# EAGLE board LR21_Dash (EAGLE 9.2.2)
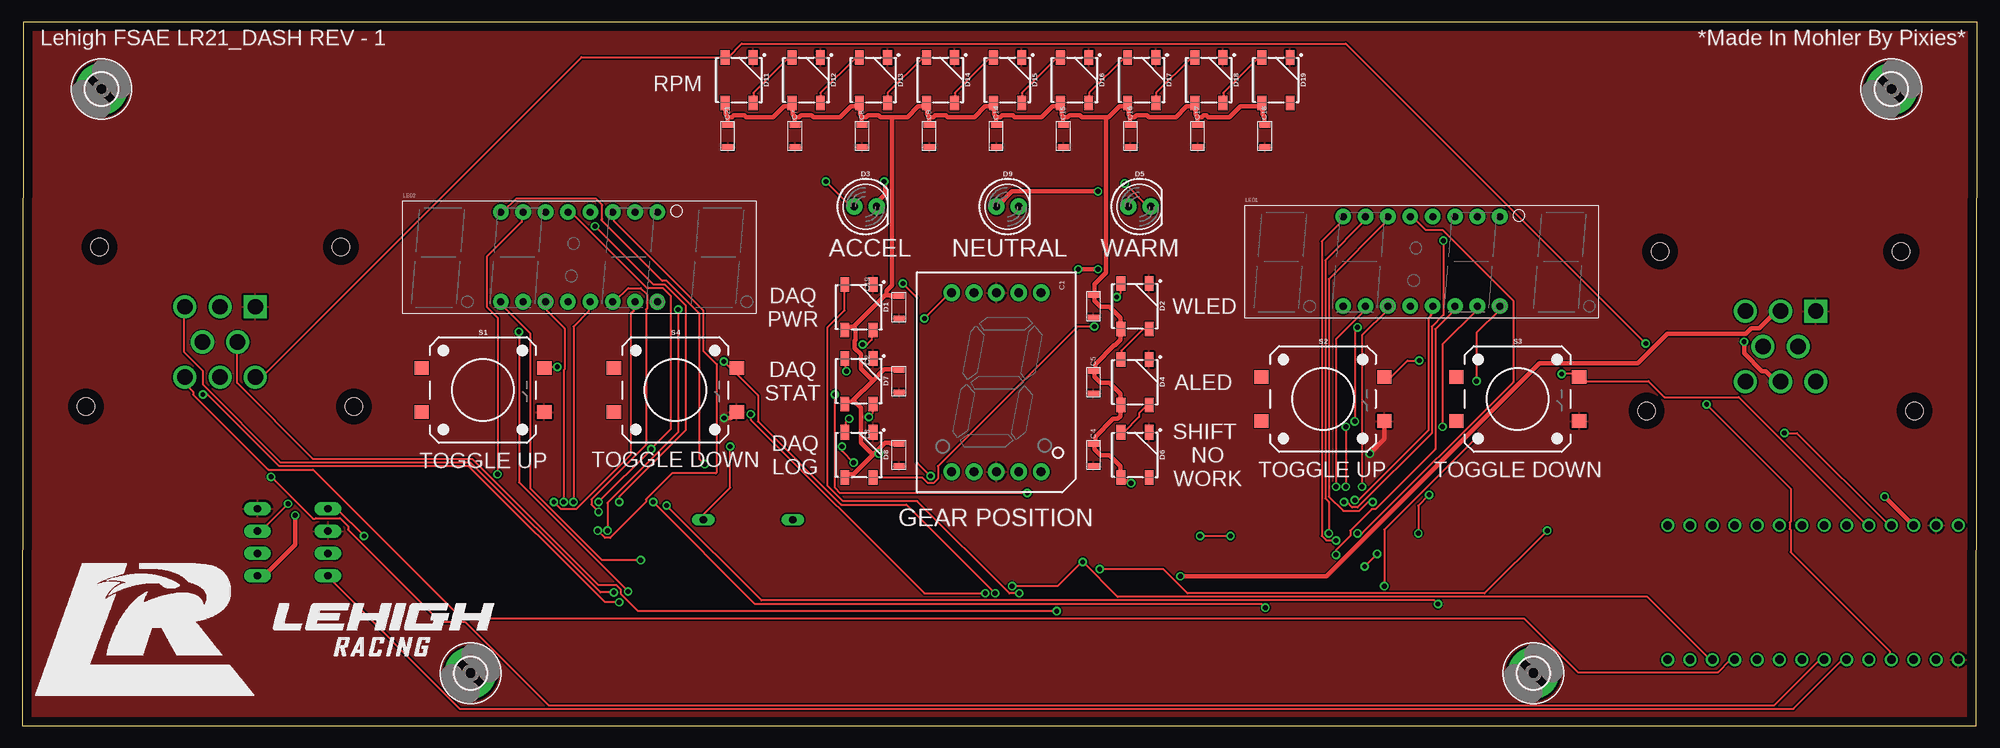
[diagram p0: board, top side]
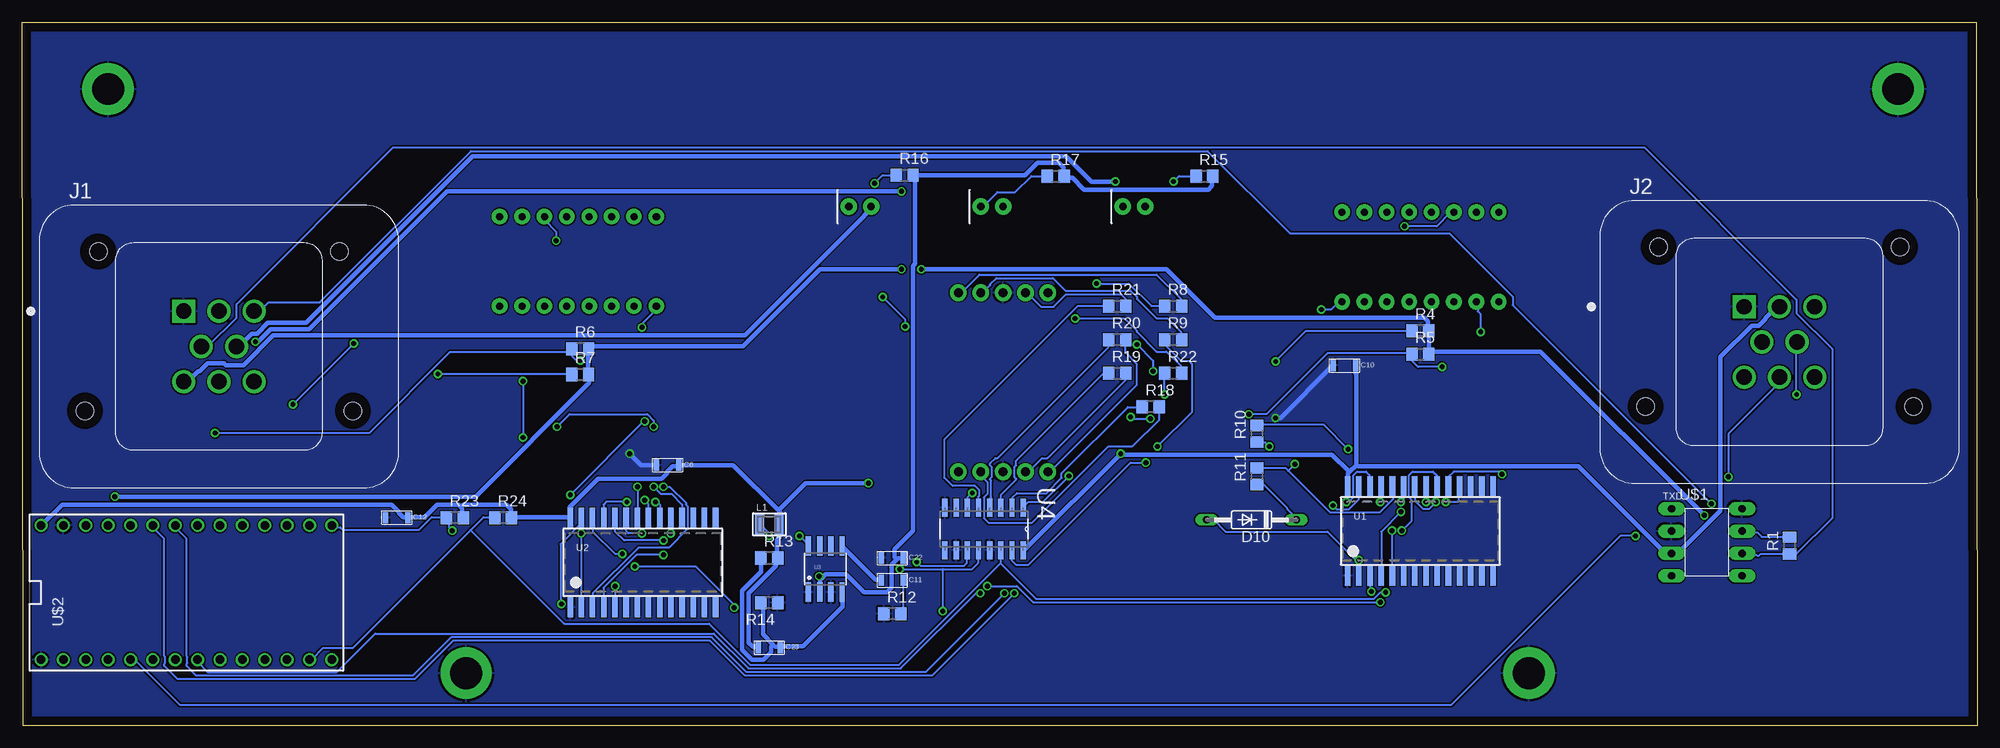
[diagram p1: board, bottom side, seen from below]

Size 222 x 79.87 mm. Coordinates in mm from the lower left corner, seen from the top.
Outline: 0,0 221.87,0 222,79.87 0.13,79.87 0,0
Copper layers (1*16): Top 0.035mm / dielectric 1.5mm / Bottom 0.035mm
Design rules "default": minimum track width 6mil, minimum drill 0.35mm, track to track 6mil, track to pad 6mil, pad to pad 6mil, via to via 6mil, smd to smd 6mil, copper to edge 40mil, drill to drill 6mil, minimum pad ring 10mil, minimum via ring 8mil, stop-mask expansion 4mil, vias tented up to drill 0mil, thermal gap 10mil
Net classes: 0 default: width 0.254 mm, drill 0.55 mm; 1 pwr: width 0.508 mm, drill 0.55 mm

## Footprints (pad centres in the part's own frame; a part is rotated, then mirrored left to right if it is on the bottom)
1005 = smd 0.635 x 1.27: P$1 1.27,0; P$2 -1.27,0
WS2812B = smd 1.651 x 1: 1 2.577,-1.6; 2 2.577,1.6; 3 -2.577,1.6; 4 -2.577,-1.6
LED_5MM = drill 0.813 pad 1.88: A -1.27,0; K 1.27,0
DO35-10 = drill 0.813 long: A 5.08,0; C -5.08,0
3,6-PAD = drill 3.6 pad 5.842: B3,6 0,0
TE_1-776276-1 = drill 1.75 square: 1 -4,4 | drill 1.75: 2 0,4; 3 4,4; 4 -2,0; 5 2,0; 6 -4,-4; 7 0,-4; 8 4,-4 | hole 2: -13.7,10.8; 13.7,10.8; -15.2,-7.3; 15.2,-7.3
INDUCTOR_1007 = smd 1.016 x 2.2: P$1 -1.127,0; P$2 1.127,0
7-SEGMENT-4DIGIT-YOUNGSUN = drill 0.8 pad 1.778: 1 -8.89,-5.08; 2 -6.35,-5.08; 3 -3.81,-5.08; 4 -1.27,-5.08; 5 1.27,-5.08; 6 3.81,-5.08; 7 6.35,-5.08; 8 8.89,-5.08; 9 8.89,5.08; 10 6.35,5.08; 11 3.81,5.08; 12 1.27,5.08; 13 -1.27,5.08; 14 -3.81,5.08; 15 -6.35,5.08; 16 -8.89,5.08
R0805 = smd 1.3 x 1.5: 1 -0.95,0; 2 0.95,0
TACTILE_SWITCH_SMD_12MM = smd 1.6 x 1.55: 1 6.975,-2.5; 2 -6.975,-2.5; 3 6.975,2.5; 4 -6.975,2.5
SOP28_300MIL = smd 0.635 x 2.286: P$1 -8.255,-5.08; P$2 -6.985,-5.08; P$3 -5.715,-5.08; P$4 -4.445,-5.08; P$5 -3.175,-5.08; P$6 -1.905,-5.08; P$7 -0.635,-5.08; P$8 0.635,-5.08; P$9 1.905,-5.08; P$10 3.175,-5.08; P$11 4.445,-5.08; P$12 5.715,-5.08; P$13 6.985,-5.08; P$14 8.255,-5.08; P$15 8.255,5.08; P$16 6.985,5.08; P$17 5.715,5.08; P$18 4.445,5.08; P$19 3.175,5.08; P$20 1.905,5.08; P$21 0.635,5.08; P$22 -0.635,5.08; P$23 -1.905,5.08; P$24 -3.175,5.08; P$25 -4.445,5.08; P$26 -5.715,5.08; P$27 -6.985,5.08; P$28 -8.255,5.08
SOIC8 = smd 0.61 x 2.21: 1 -1.905,-2.616; 2 -0.635,-2.616; 3 0.635,-2.616; 4 1.905,-2.616; 5 1.905,2.616; 6 0.635,2.616; 7 -0.635,2.616; 8 -1.905,2.616
SOIC127P600X175-16N = smd 2.057 x 0.61: 1 -4.801,8.89; 2 -4.801,7.62; 3 -4.801,6.35; 4 -4.801,5.08; 5 -4.801,3.81; 6 -4.801,2.54; 7 -4.801,1.27; 8 -4.801,0; 9 0,0; 10 0,1.27; 11 0,2.54; 12 0,3.81; 13 0,5.08; 14 0,6.35; 15 0,7.62; 16 0,8.89
MCP2561_PDIP = drill 0.813 pad 1.524 long: CANH 4,1.27; CANL 4,-1.27; RXD -4,-3.81; SPLIT 4,-3.81; STBY 4,3.81; TXD -4,3.81; VDD -4,-1.27; VSS -4,1.27
TEENSY_3.0-3.2&LC_DIL = drill 0.965: 0 -7.62,13.97; 1 -7.62,11.43; 2 -7.62,8.89; 3 -7.62,6.35; 3.3V 7.62,11.43; 4 -7.62,3.81; 5 -7.62,1.27; 6 -7.62,-1.27; 7 -7.62,-3.81; 8 -7.62,-6.35; 9 -7.62,-8.89; 10 -7.62,-11.43; 11 -7.62,-13.97; 12 -7.62,-16.51; 13 7.62,-16.51; 14/A0 7.62,-13.97; 15/A1 7.62,-11.43; 16/A2 7.62,-8.89; 17/A3 7.62,-6.35; 18/A4 7.62,-3.81; 19/A5 7.62,-1.27; 20/A6 7.62,1.27; 21/A7 7.62,3.81; 22/A8 7.62,6.35; 23/A9 7.62,8.89; AGND 7.62,13.97; GND -7.62,16.51; VIN 7.62,16.51
7-SEGMENT-1"PTH = drill 1 pad 1.88: 1 -5.08,-10.16; 2 -2.54,-10.16; 3 0,-10.16; 4 2.54,-10.16; 5 5.08,-10.16; 6 5.08,10.16; 7 2.54,10.16; 8 0,10.16; 9 -2.54,10.16; 10 -5.08,10.16

## Placement (x,y rotation side)
C1  0.1uF  [1005]  121.67,47.62 90 top
C2  0.1uF  [1005]  99.57,39.12 90 top
C3  0.1uF  [1005]  99.57,30.73 90 top
C4  0.1uF  [1005]  121.67,30.73 90 top
C5  0.1uF  [1005]  121.67,38.99 90 top
C6  100uF  [1005]  148.72,29.59 0 bottom
C7  0.1uF  [1005]  87.76,66.93 90 top
C8  0.1uF  [1005]  95.38,66.93 90 top
C9  0.1uF  [1005]  103,66.93 90 top
C10  100uF  [1005]  71.88,40.89 0 bottom
C11  3.9u  [1005]  123.19,16.51 0 bottom
C12  100uF  [1005]  179.45,23.62 0 bottom
C14  0.1uF  [1005]  110.62,66.93 90 top
C15  0.1uF  [1005]  118.24,66.93 90 top
C16  0.1uF  [1005]  125.86,66.93 90 top
C17  0.1uF  [1005]  133.48,66.93 90 top
C18  0.1uF  [1005]  141.1,66.93 90 top
C19  0.1uF  [1005]  99.57,47.5 90 top
C21  0.1uF  [1005]  80.14,66.93 90 top
C22  22u  [1005]  123.19,19.05 0 bottom
C23  22u  [1005]  137.16,8.89 0 bottom
D1  WS2812B  [WS2812B]  95,47.5 270 top
D2  WS2812B  [WS2812B]  126.36,47.62 270 top
D3  [LED_5MM]  95.76,58.93 0 top
D4  WS2812B  [WS2812B]  126.36,38.99 270 top
D5  [LED_5MM]  126.87,58.93 0 top
D6  WS2812B  [WS2812B]  126.36,30.73 270 top
D7  WS2812B  [WS2812B]  95,39.12 270 top
D8  WS2812B  [WS2812B]  95,30.73 270 top
D9  [LED_5MM]  111.89,58.93 0 top
D10  1N4148  [DO35-10]  82.42,23.37 180 bottom
D11  WS2812B  [WS2812B]  81.41,73.28 270 top
D12  WS2812B  [WS2812B]  89.03,73.28 270 top
D13  WS2812B  [WS2812B]  96.65,73.28 270 top
D14  WS2812B  [WS2812B]  104.27,73.28 270 top
D15  WS2812B  [WS2812B]  111.89,73.28 270 top
D16  WS2812B  [WS2812B]  119.51,73.28 270 top
D17  WS2812B  [WS2812B]  127.13,73.28 270 top
D18  WS2812B  [WS2812B]  134.75,73.28 270 top
D19  WS2812B  [WS2812B]  142.37,73.28 270 top
H5  MOUNT-PAD-ROUND3.6  [3,6-PAD]  171.58,5.97 0 top
H6  MOUNT-PAD-ROUND3.6  [3,6-PAD]  50.93,5.97 0 top
H7  MOUNT-PAD-ROUND3.6  [3,6-PAD]  212.22,72.26 0 top
H8  MOUNT-PAD-ROUND3.6  [3,6-PAD]  9.02,72.26 0 top
J1  1-776276-1  [TE_1-776276-1]  199.64,43.05 0 bottom
J2  1-776276-1  [TE_1-776276-1]  22.48,43.56 0 bottom
L1  4.7u  [INDUCTOR_1007]  137.16,22.86 0 bottom
LED1  YSD-439AB4B-35  [7-SEGMENT-4DIGIT-YOUNGSUN]  158.88,52.7 0 top
LED2  YSD-439AB4B-35  [7-SEGMENT-4DIGIT-YOUNGSUN]  63.25,53.21 0 top
R1  120  [R0805]  21.34,20.45 90 bottom
R4  10k  [R0805]  63.25,44.83 0 bottom
R5  10k  [R0805]  63.25,42.16 0 bottom
R6  10k  [R0805]  158.62,42.8 0 bottom
R7  10k  [R0805]  158.62,39.88 0 bottom
R8  220  [R0805]  91.31,47.62 0 bottom
R9  220  [R0805]  91.31,43.81 0 bottom
R10  47K  [R0805]  81.79,33.15 90 bottom
R11  47K  [R0805]  81.79,28.32 90 bottom
R12  10k  [R0805]  123.19,12.7 0 bottom
R13  24.9k  [R0805]  137.16,19.05 0 bottom
R14  4.75k  [R0805]  137.16,13.97 180 bottom
R15  560  [R0805]  87.76,62.36 0 bottom
R16  560  [R0805]  121.79,62.48 0 bottom
R17  560  [R0805]  104.65,62.36 0 bottom
R18  220  [R0805]  93.85,36.2 0 bottom
R19  220  [R0805]  97.66,40.01 0 bottom
R20  220  [R0805]  97.66,43.81 0 bottom
R21  220  [R0805]  97.66,47.62 0 bottom
R22  220  [R0805]  91.31,40.01 0 bottom
R23  10k  [R0805]  172.85,23.62 0 bottom
R24  10k  [R0805]  167.39,23.62 0 bottom
S1  MOMENTARY-SWITCH-SPST-SMD-12MM  [TACTILE_SWITCH_SMD_12MM]  52.32,38.1 0 top
S2  MOMENTARY-SWITCH-SPST-SMD-12MM  [TACTILE_SWITCH_SMD_12MM]  147.7,37.08 0 top
S3  MOMENTARY-SWITCH-SPST-SMD-12MM  [TACTILE_SWITCH_SMD_12MM]  169.8,37.08 0 top
S4  MOMENTARY-SWITCH-SPST-SMD-12MM  [TACTILE_SWITCH_SMD_12MM]  74.17,38.1 0 top
U1  [SOP28_300MIL]  63.25,22.1 0 bottom
U2  [SOP28_300MIL]  151.51,18.54 0 bottom
U3  NCP3170  [SOIC8]  130.81,17.78 0 bottom
U4  SN74HC595D  [SOIC127P600X175-16N]  117.22,19.94 270 bottom
U$1  MCP2561MCP  [MCP2561_PDIP]  30.73,20.83 0 bottom
U$2  TEENSY_3.1-3.2_DIL  [TEENSY_3.0-3.2&LC_DIL]  203.33,15.11 90 bottom
U$3  YSD-160AB3C-8  [7-SEGMENT-1"PTH]  110.62,38.99 0 top

## Library data of the parts
C1-C12 C14-C19 C21-C23 = scenix4
D1 D2 D4 D6-D8 D11-D19 = SparkFun-LED@1; PROD_ID: DIO-12503
D3 D5 D9 = SparkFun-LED
D10 = diode
H5-H8 = holes
J1 J2 = 1-776276-1; MANUFACTURER: TE Connectivity; METADATA: Manufacturer recommendations; PARTREV: B9
L1 U1 U2 = microbuilder
LED1 LED2 = SparkFun-LED@1; PROD_ID: COMP-09664
R1 R4-R24 = eagle-ltspice; SPICEMODEL: NONE; SPICEPREFIX: R
S1-S4 = SparkFun-Switches; PROD_ID: SWCH-11967; SF_SKU: COM-12993
U3 = NCP3170; AVAILABILITY: Unavailable; DESCRIPTION: ON Semiconductor 3A SWITCHING REGULATOR; MF: ON Semiconductor; MP: NCP3170; PACKAGE: SOIC-8 ON Semiconductor; PRICE: None
U4 = SN74HC595D; DESCRIPTION: Shift Register Single 8-Bit Serial to Serial/Parallel 16-Pin SOIC Tube; DIGI-KEY_PART_NUMBER: 296-8344-5-ND; DIGI-KEY_PURCHASE_URL: https://www.digikey.com/product-detail/en/texas-instruments/SN74HC595D/296-8344-5-ND/376752?utm_source=snapeda&utm_medium=aggregator&utm_campaign=symbol; MF: Texas Instruments; MP: SN74HC595D; PACKAGE: SOIC-16 Texas Instruments
U$1 = PoJD
U$2 = Teensy_3_and_LC_Series_Boards_v1.4
U$3 = SparkFun-LED; PROD_ID: COMP-09495

## Nets
A-1: LED2.14 U1.P$25
A-2: LED1.14 U2.P$25
ACCEL_LED [pwr]: D3.K J1.5
B-1: LED2.16 R11.2 U1.P$24
B-2: LED1.16 U2.P$24
BUTTON1_WHEEL: J2.7 U$2.5
BUTTON2_WHEEL: J2.8 U$2.9
BUTTON-1: R4.1 S4.3 U$2.20/A6
BUTTON-2: R5.1 S1.3 U$2.21/A7
BUTTON-3: R7.1 S3.3 U$2.22/A8
BUTTON-4: R6.1 S2.3 U$2.23/A9
C-1: LED2.13 R10.2 U1.P$23
C-2: LED1.13 U2.P$23
CAN-RX: U$1.RXD U$2.4
CAN-TX: U$1.TXD U$2.3
CAN_H: J1.3 R1.2 U$1.CANH
CAN_L: J1.4 R1.1 U$1.CANL
CLOCK: J2.4 R23.1 U4.12 U$2.13
D-1: LED2.3 U1.P$22
D-2: LED1.3 U2.P$22
DATA: J2.3 R24.1 U4.14 U$2.11
DIG1-1: D10.A LED2.1 U1.P$2
DIG1-2: LED2.2 U1.P$3
DIG1-3: LED2.6 U1.P$4
DIG1-4: LED2.8 U1.P$5
DIG2-1: LED1.1 U2.P$2
DIG2-2: LED1.2 U2.P$3
DIG2-3: LED1.6 U2.P$4
DIG2-4: LED1.8 U2.P$5
DP-1: LED2.7 U1.P$18
DP-2: LED1.7 U2.P$18
E-1: LED2.5 U1.P$21
E-2: LED1.5 U2.P$21
F-1: LED2.11 U1.P$20
F-2: LED1.11 U2.P$20
FLEX: J1.8
G-1: LED2.15 U1.P$19
G-2: LED1.15 U2.P$19
GND [pwr]: C1.P$2 C2.P$2 C3.P$2 C4.P$2 C5.P$2 C6.P$2 C7.P$2 C8.P$2 C9.P$2 C10.P$2 C12.P$2 C14.P$2 C15.P$2 C16.P$2 C17.P$2 C18.P$2 C19.P$2 C21.P$2 C22.P$2 D1.3 D2.3 D4.3 D6.3 D7.3 D8.3 D11.3 D12.3 D13.3 D14.3 D15.3 D16.3 D17.3 D18.3 D19.3 H5.B3,6 H6.B3,6 H7.B3,6 H8.B3,6 J1.1 J2.1 R12.1 R14.1 S1.1 S2.1 S3.1 S4.1 U1.P$1 U2.P$1 U3.1 U3.3 U4.8 U4.10 U4.13 U$1.STBY U$1.VSS U$2.AGND U$2.GND U$3.3 U$3.8
LATCH: J2.5 U4.11 U$2.10
LED_TACH_3V3: D11.4 J2.6 U$2.2
LED_WARN_3V1: D13.2 D14.4
LED_WARN_3V3: D1.4 U$2.6
N$2: D10.C R10.1 R11.1
N$4: D2.2 D4.4
N$6: D4.2 D6.4
N$8: D3.A R15.1
N$9: D5.K R16.1
N$10 [pwr]: C11.P$2 U3.5
N$11: D9.K R17.1
N$12: C11.P$1 R12.2
N$14: D2.4 D8.2
N$15: L1.P$1 U3.8
N$16: R8.1 U4.1
N$17: R9.1 U4.15
N$18: R18.1 U4.2
N$19: R19.1 U4.3
N$20: R20.1 U4.4
N$21: D11.2 D12.4
N$22 [pwr]: C23.P$1 R13.1 R14.2 U3.4
N$23: D1.2 D7.4
N$24: D7.2 D8.4
N$25: R21.1 U4.5
N$26: R22.1 U4.6
N$28: D12.2 D13.4
N$29: D14.2 D15.4
N$30: D15.2 D16.4
N$31: D17.2 D18.4
N$32: D18.2 D19.4
N$33: D16.2 D17.4
NEUTRAL_LED [pwr]: D9.A J1.7
PIN_A: R9.2 U$3.7
PIN_B: R8.2 U$3.6
PIN_C: R18.2 U$3.4
PIN_D: R19.2 U$3.2
PIN_E: R20.2 U$3.1
PIN_F: R21.2 U$3.9
PIN_G: R22.2 U$3.10
SCL: U1.P$26 U2.P$26
SDA: U1.P$27 U2.P$27
VDD12V_DASH [pwr]: C22.P$1 J1.2 R15.2 R16.2 R17.2 U3.2
VDD_3V3 [pwr]: R4.2 R5.2 R6.2 R7.2 U$1.SPLIT U$2.3.3V
VIN [pwr]: C1.P$1 C2.P$1 C3.P$1 C4.P$1 C5.P$1 C6.P$1 C7.P$1 C8.P$1 C9.P$1 C10.P$1 C12.P$1 C14.P$1 C15.P$1 C16.P$1 C17.P$1 C18.P$1 C19.P$1 C21.P$1 C23.P$2 D1.1 D2.1 D4.1 D6.1 D7.1 D8.1 D11.1 D12.1 D13.1 D14.1 D15.1 D16.1 D17.1 D18.1 D19.1 J2.2 L1.P$2 R13.2 R23.2 R24.2 U1.P$28 U2.P$28 U4.16 U$1.VDD U$2.VIN
WARM_LED [pwr]: D5.A J1.6

## Tracks (layer width: path | path; a pad name or v marks a point on that pad's centre or on a via)
A-1  (via drill 0.55)
  Top 0.254: v67.79,25.4 67.79,26.01 75.31,33.53 75.31,47.75 72.97,50.09 71.65,50.09 v65.05,56.69
  Bottom 0.254: U1.P$25 67.69,25.5 v67.79,25.4 | v65.05,56.69 61.39,56.69 59.87,58.22 59.46,58.22 LED2.14
A-2  (via drill 0.55)
  Top 0.254: v153.34,25.4 152.83,25.4 151.82,24.38 149.99,24.38 148.36,26.01 148.36,50.7 155.07,57.4 LED1.14
  Bottom 0.254: v153.34,25.4 155.68,25.4 155.98,25.09 155.98,23.67 U2.P$25
ACCEL_LED  (via drill 0.55)
  Top 0.508: v97.87,61.77 97.97,61.67 97.97,60.35 97.05,59.44 97.05,58.93 D3.K
  Bottom 0.508: v97.87,61.77 100.61,61.77 103.45,64.62 170.81,64.62 189.71,45.72 194.08,45.72 195.3,44.5 195.91,44.5 197.33,43.08 197.64,43.08 J1.5
B-1  (via drill 0.55)
  Top 0.254: v77.49,29.69 76.94,30.25 76.94,46.74 73.18,50.49 72.67,50.49 65.76,57.4 65.86,57.51 65.86,59.13 65.15,59.84 56.11,59.84 54.59,58.32 54.38,58.32 LED2.16
  Bottom 0.254: 78.24,28.94 73.48,24.18 67.89,24.18 66.37,25.7 66.37,27.13 U1.P$24 | R11.2 81.71,29.26 78.56,29.26 78.24,28.94 | 78.24,28.94 v77.49,29.69
B-2  (via drill 0.55)
  Top 0.254: v149.17,21.03 148.06,21.03 147.55,21.54 147.55,54.97 149.99,57.4 LED1.16
  Bottom 0.254: v149.17,21.03 153.65,21.03 154.66,22.05 154.66,23.57 U2.P$24
BUTTON1_WHEEL  (via drill 0.55)
  Top 0.254: v28.27,28.25 33.05,23.47 33.25,23.47 33.35,23.57 36.09,23.57 37.01,22.66 37.01,22.25 47.47,11.79 50.32,11.79 59.77,2.34 198.96,2.34 204.04,7.42 204.55,7.42 U$2.5
  Bottom 0.254: v28.27,28.25 28.27,33.12 22.48,38.91 J2.7
BUTTON2_WHEEL
  Top 0.254: U$2.9 194.39,7.42 193.88,7.42 192.56,6.1 176.61,6.1 170.51,12.19 49.91,12.19 33.05,29.06 27.96,29.06 19.43,37.59 19.43,37.9 18.52,38.81 18.52,39.52 J2.8
BUTTON-1  (via drill 0.55)
  Top 0.254: v79.68,41.35 80.39,40.64 81.1,40.64 S4.3 81.1,40.54 81.1,39.93 83.54,37.49 83.54,34.54 92.99,25.09 100.41,25.09 v110.46,15.04
  Bottom 0.254: v79.68,41.35 76.22,44.81 64.24,44.81 R4.1 | v110.46,15.04 119.41,6.1 139.73,6.1 143.69,10.06 173.25,10.06 177.62,5.69 202.21,5.69 203.33,6.81 203.33,7.01 203.23,7.11 203.23,7.82 203.33,7.92 203.33,21.23 204.55,22.45 204.55,22.66 U$2.20/A6
BUTTON-2  (via drill 0.55)
  Top 0.254: v60.78,40.74 59.46,40.74 59.36,40.64 S1.3 | v109.35,15.04 102.44,15.04 82.73,34.75 v82.73,35.36
  Bottom 0.254: v60.78,40.74 63.53,40.74 64.13,41.35 64.13,42.16 R5.1 64.24,42.27 73.79,42.27 80.7,35.36 v82.73,35.36 | v109.35,15.04 118.69,5.69 139.93,5.69 143.89,9.65 173.05,9.65 177.42,5.28 204.34,5.28 205.87,6.81 205.87,7.01 205.77,7.11 205.77,7.82 205.87,7.92 205.87,21.23 207.09,22.45 207.09,22.66 U$2.21/A7
BUTTON-3  (via drill 0.55)
  Top 0.254: v174.78,39.93 176.4,39.93 176.71,39.62 S3.3 176.81,39.52 177.22,39.12 184.63,39.12 186.46,37.29 194.89,37.29 209.42,22.76 209.63,22.76 U$2.22/A8
  Bottom 0.254: v174.78,39.93 159.64,39.93 R7.1
BUTTON-4  (via drill 0.55)
  Top 0.254: v158.62,41.45 157.3,41.45 155.37,39.52 154.76,39.52 S2.3 | v200.08,33.22 201.5,33.22 211.96,22.76 212.17,22.76 U$2.23/A9
  Bottom 0.254: v158.62,41.45 159.03,41.45 159.54,41.96 159.54,42.77 R6.1 159.64,42.37 173.46,42.37 182.6,33.22 v200.08,33.22
C-1  (via drill 0.55)
  Top 0.254: v65.46,25.4 v71.45,31.39 71.45,31.5 73.69,33.73 73.69,48.77 72.77,49.68 70.94,49.68 62.41,58.22 62,58.22 LED2.13
  Bottom 0.254: v71.45,31.39 74.19,34.14 81.71,34.14 R10.2 | v65.46,25.4 65.15,25.7 U1.P$23
C-2  (via drill 0.55)
  Top 0.254: v151.61,21.84 152.12,21.84 169.29,39.01 169.29,48.26 161.27,56.29 159.33,56.29 157.91,57.71 157.61,57.71 LED1.13
  Bottom 0.254: v151.61,21.84 153.14,21.84 153.44,22.15 153.44,23.57 U2.P$23
CAN-RX
  Top 0.254: U$2.4 207.09,7.42 206.58,7.42 201.09,1.93 49.71,1.93 34.67,16.97 U$1.RXD
CAN-TX  (via drill 0.55)
  Top 0.254: v38.84,21.54 35.79,24.59 34.77,24.59 U$1.TXD
  Bottom 0.254: v38.84,21.54 40.56,21.54 59.77,2.34 204.04,2.34 209.12,7.42 209.63,7.42 U$2.3
CAN_H  (via drill 0.55)
  Top 0.254: v30.2,25.2 27.15,22.15 26.75,22.15 U$1.CANH
  Bottom 0.254: R1.2 21.36,21.44 24.51,21.44 25.02,21.95 25.22,21.95 25.32,22.05 26.64,22.05 U$1.CANH | v30.2,25.2 52.76,47.75 52.76,48.67 59.97,55.88 78.05,55.88 87.4,65.23 171.02,65.23 188.19,48.06 193.98,48.06 194.89,47.14 195.61,47.14 J1.3
CAN_L
  Bottom 0.254: U$1.CANL 26.64,19.51 25.32,19.51 25.22,19.41 25.12,19.41 25.02,19.3 24.82,19.3 24.61,19.51 21.36,19.51 R1.1 21.26,19.51 20.55,19.51 16.48,23.57 16.48,42.77 20.55,46.84 20.55,48.36 37.82,65.63 179.86,65.63 197.64,47.85 197.64,46.33 200.89,43.08 201.6,43.08 J1.4
CLOCK  (via drill 0.55)
  Top 0.254: v122.35,17.78 129.56,17.78 132.31,15.04 166.04,15.04 v173.15,22.15 | v117.47,13.01 69.93,13.01 68,14.94 68,15.44 67.49,15.95 65.46,15.95 51.13,30.28 33.05,30.28 24.41,38.91 24.41,43.48 J2.4
  Bottom 0.254: U$2.13 186.77,22.66 186.67,22.55 185.85,22.55 185.55,22.25 176.91,22.25 175.49,23.67 173.86,23.67 R23.1 173.76,23.57 173.56,23.37 173.56,22.55 v173.15,22.15 | U4.12 113.41,18.49 114.12,17.78 117.47,17.78 | v122.35,17.78 117.47,17.78 | 117.47,17.78 v117.47,13.01
D-1  (via drill 0.55)
  Top 0.254: v61.49,25.4 61.49,40.34 61.6,40.44 61.6,45.11 59.56,47.14 59.56,47.24 59.46,47.35 59.46,48.06 LED2.3
  Bottom 0.254: v61.49,25.4 62.31,24.59 62.92,24.59 63.83,25.5 63.83,27.13 U1.P$22
D-2  (via drill 0.55)
  Top 0.254: v152.12,27.13 152.12,44.3 155.07,47.24 LED1.3
  Bottom 0.254: v152.12,27.13 152.12,23.67 U2.P$22
DATA  (via drill 0.55)
  Top 0.254: v67.18,15.14 65.66,15.14 50.93,29.87 29.39,29.87 20.55,38.71 20.55,40.23 18.41,42.37 18.41,47.55 J2.3
  Bottom 0.254: 171.07,22.2 184.43,8.84 187.78,8.84 189.1,7.52 189.31,7.52 U$2.11 | 171.07,22.2 169.6,23.67 168.38,23.67 R24.1 | 110.87,18.49 U4.14 | 110.87,18.49 122.45,6.91 139.32,6.91 143.99,11.58 160.45,11.58 171.07,22.2 | v67.18,15.14 67.79,15.14 68.5,14.43 106.91,14.43 110.87,18.39 110.87,18.49
DIG1-1  (via drill 0.55)
  Top 0.254: v70.23,18.8 65.86,18.8 57.73,26.92 57.73,44.5 54.38,47.85 54.38,48.06 LED2.1
  Bottom 0.254: U1.P$2 70.23,18.49 70.38,18.64 | 70.38,18.64 73.79,22.05 85.37,22.05 86.69,23.37 D10.A | 70.38,18.64 v70.23,18.8
DIG1-2  (via drill 0.55)
  Top 0.254: v68.81,15.24 56.41,27.64 v56.41,44.7
  Bottom 0.254: v68.81,15.24 68.91,15.34 68.91,16.97 U1.P$3 | v56.41,44.7 56.41,46.74 56.72,47.04 56.72,47.24 56.82,47.35 56.82,48.06 LED2.2
DIG1-3  (via drill 0.55)
  Top 0.254: v65.46,24.28 64.64,25.09 64.64,25.7 70.84,31.9 70.84,47.24 70.94,47.35 70.94,48.97 70.23,49.68 68.81,49.68 67.28,48.16 67.08,48.16 LED2.6
  Bottom 0.254: U1.P$4 67.69,22.05 v65.46,24.28
DIG1-4  (via drill 0.55)
  Top 0.254: v66.47,22.15 66.47,25.3 74.5,33.33 v74.5,47.24
  Bottom 0.254: v66.47,22.15 66.47,17.07 U1.P$5 | v74.5,47.24 73.38,47.24 72.57,48.06 72.16,48.06 LED2.8
DIG2-1  (via drill 0.55)
  Top 0.254: v158.52,21.84 158.52,24.99 v159.74,26.21 | v151.31,34.54 151.31,44.91 v151.61,45.21
  Bottom 0.254: v158.52,21.84 158.52,13.51 U2.P$2 | v159.74,26.21 151.41,34.54 v151.31,34.54 | v151.61,45.21 151.61,45.62 149.99,47.24 LED1.1
DIG2-2  (via drill 0.55)
  Top 0.254: v149.17,27.13 149.17,43.89 152.53,47.24 LED1.2
  Bottom 0.254: v149.17,27.13 148.46,27.13 146.63,25.3 146.63,25.09 146.43,24.89 146.43,22.35 148.56,20.22 152.02,20.22 157.2,15.04 157.2,13.51 U2.P$3
DIG2-3  (via drill 0.55)
  Top 0.254: v149.17,19.41 149.17,19.91 150.8,21.54 150.8,22.15 153.24,24.59 153.65,24.59 160.45,31.39 160.45,45.01 162.69,47.24 LED1.6
  Bottom 0.254: v149.17,19.41 152.22,19.41 155.98,15.65 155.98,13.51 U2.P$4
DIG2-4  (via drill 0.55)
  Top 0.254: v154.66,15.85 154.66,22.25 v165.12,32.72 | v165.12,39.12 165.12,44.6 167.77,47.24 LED1.8
  Bottom 0.254: v154.66,15.85 154.66,13.51 U2.P$5 | v165.12,39.12 v165.12,32.72
DP-1  (via drill 0.55)
  Top 0.254: v60.38,25.4 61.19,24.59 62.92,24.59 69.11,30.79 69.11,46.74 69.42,47.04 69.42,47.24 69.52,47.35 69.52,48.06 LED2.7
  Bottom 0.254: v60.38,25.4 59.05,25.4 58.85,25.6 58.85,27.13 U1.P$18
DP-2  (via drill 0.55)
  Top 0.254: v150.29,33.93 v150.29,27.13 | v161.27,33.93 161.27,43.28 165.23,47.24 LED1.7
  Bottom 0.254: v150.29,27.13 149.48,26.31 148.26,26.31 147.04,25.09 147.04,23.67 U2.P$18 | v150.29,33.93 150.29,34.65 151,35.36 159.84,35.36 v161.27,33.93
E-1  (via drill 0.55)
  Top 0.254: v62.61,25.4 62.61,45.31 64.34,47.04 64.34,47.24 64.44,47.35 64.44,48.06 LED2.5
  Bottom 0.254: v62.61,25.4 U1.P$21
E-2  (via drill 0.55)
  Top 0.254: v151.31,25.6 151.71,25.6 159.64,33.53 159.64,46.23 159.94,46.53 159.94,46.63 160.15,46.84 LED1.5
  Bottom 0.254: v151.31,25.6 150.9,25.2 150.9,23.67 U2.P$21
F-1  (via drill 0.55)
  Top 0.254: v65.35,22.15 66.17,21.34 66.78,21.34 70.84,25.4 70.84,25.7 73.79,28.65 78.77,28.65 78.87,28.75 78.87,41.05 77.34,42.57 77.34,47.14 67.18,57.3 67.18,57.4 67.08,57.51 67.08,58.22 LED2.11
  Bottom 0.254: v65.35,22.15 64.24,23.27 64.24,25.6 64.54,25.91 64.54,28.45 64.13,28.85 61.8,28.85 61.39,28.45 61.39,27.23 U1.P$20
F-2  (via drill 0.55)
  Top 0.254: v150.09,25.4 150.39,25.4 151,24.79 151.61,24.79 160.05,33.22 160.05,45.31 161.37,46.63 v161.37,55.07
  Bottom 0.254: v150.09,25.4 149.89,25.4 149.58,25.09 149.58,23.67 U2.P$20 | v161.37,55.07 161.37,56.08 162.69,57.4 LED1.11
G-1  (via drill 0.55)
  Top 0.254: v53.98,28.55 53.98,46.33 52.76,47.55 52.76,53.24 56.72,57.2 56.72,57.4 56.82,57.51 56.82,58.22 LED2.15
  Bottom 0.254: U1.P$19 60.07,28.25 59.46,28.85 54.28,28.85 v53.98,28.55
G-2  (via drill 0.55)
  Top 0.254: v148.36,21.84 148.36,25.4 147.96,25.81 147.96,52.83 152.53,57.4 LED1.15
  Bottom 0.254: v148.36,21.84 148.36,23.57 U2.P$19
GND  (via drill 0.55)
  Top 0.508: v79.7,34.92 80.47,34.92 S4.1 | S2.1 154.68,32.55 v153.01,30.89
  Bottom 0.508: C10.P$2 79.12,34.92 v79.7,34.92 | v153.01,30.89 151.71,29.59 C6.P$2
  pour Top: -1.14,79.88 -1.14,-2.03 1.91,-5.08 221.11,-5.08 224.92,-1.27 224.92,78.61 219.84,83.69 2.67,83.69
  pour Bottom: 2.67,83.69 -1.14,79.88 -1.14,-2.03 1.91,-5.08 221.11,-5.08 224.92,-1.27 224.92,78.61 219.84,83.69
LATCH  (via drill 0.55)
  Top 0.254: U$2.10 191.85,7.52 191.64,7.52 184.53,14.63 124.38,14.63 v120.42,18.59 120.32,18.59 117.58,15.85 v112.39,15.85 | v20.55,37.59 21.06,37.59 29.18,29.46 50.72,29.46 66.17,14.02 v67.79,14.02
  Bottom 0.254: v120.42,18.59 120.02,18.19 115.04,18.19 114.73,18.49 114.73,19.91 U4.11 | v20.55,37.59 20.55,43.48 J2.5 | v67.79,14.02 107.21,14.02 109.04,15.85 v112.39,15.85
LED_TACH_3V3  (via drill 0.55)
  Top 0.254: J2.6 26.54,39.62 27.25,39.62 63.53,75.89 79.78,75.89 D11.4 79.88,75.89 80.19,75.89 81.71,77.42 150.29,77.42 v184.33,43.38 | v191.24,36.47 200.79,26.92 200.79,23.16 200.69,23.06 200.69,22.35 200.79,22.25 200.79,19.71 212.06,8.43 212.06,8.23 212.17,8.13 212.17,7.52 U$2.2
  Bottom 0.254: v184.33,43.38 v191.24,36.47
LED_WARN_3V1
  Top 0.254: D13.2 98.27,70.71 98.27,71.83 102.34,75.89 102.64,75.89 D14.4
LED_WARN_3V3  (via drill 0.55)
  Top 0.254: v113.21,15.04 112.09,15.04 101.62,25.5 93.19,25.5 91.46,27.23 91.46,45.21 93.4,47.14 93.4,49.99 D1.4
  Bottom 0.254: v113.21,15.04 113.72,15.04 122.25,6.5 139.52,6.5 143.49,10.46 181.89,10.46 186.26,6.1 200.89,6.1 202.01,7.21 202.01,7.42 U$2.6
N$2  (via drill 0.55)
  Top 0.254: v80.39,31.7 80.39,27.03 77.34,23.98 D10.C
  Bottom 0.254: D10.C 77.34,23.57 78.36,24.59 78.36,24.69 81,27.33 81.71,27.33 R11.1 | v80.39,31.7 80.8,32.11 81.71,32.11 R10.1
N$4
  Top 0.254: D4.4 124.79,41.66 124.79,42.57 127.23,45.01 127.94,45.01 D2.2
N$6
  Top 0.254: D6.4 124.79,33.33 125.09,33.33 126.82,35.05 126.82,35.46 127.74,36.37 127.94,36.37 D4.2
N$8  (via drill 0.55)
  Top 0.254: v91.26,61.77 94.11,58.93 D3.A
  Bottom 0.254: v91.26,61.77 90.65,62.38 88.72,62.38 R15.1
N$9  (via drill 0.55)
  Top 0.254: v125.2,61.57 127.84,58.93 D5.K
  Bottom 0.254: R16.1 124.28,62.48 v125.2,61.57
N$10
  Bottom 0.508: C11.P$2 124.48,16.56 125.09,16.56 128.75,20.22 128.85,20.22 128.96,20.32 U3.5
N$11
  Bottom 0.254: D9.K 112.9,58.93 111.28,60.55 109.24,60.55 107.42,62.38 105.69,62.38 R17.1
N$12
  Bottom 0.254: C11.P$1 121.94,16.46 121.94,12.9 122.15,12.7 R12.2
N$14  (via drill 0.55)
  Top 0.254: v121.74,45.31 119.81,45.31 103.96,29.46 103.96,28.04 103.45,27.53 102.84,27.53 102.23,28.14 96.65,28.14 D8.2 | v124.28,48.67 124.69,49.07 124.69,50.19 D2.4
  Bottom 0.254: v121.74,45.31 121.74,46.13 v124.28,48.67
N$15  (via drill 0.55)
  Top 0.254: v133.73,21.54 v137.19,21.54
  Bottom 0.254: v137.19,21.54 137.19,21.84 138.2,22.86 L1.P$1 | v133.73,21.54 132.72,20.52 U3.8
N$16  (via drill 0.55)
  Top 0.254: v100,50.19 101.62,48.56 101.62,29.87 v103.15,28.35
  Bottom 0.254: v100,50.19 96.34,50.19 93.8,47.65 92.28,47.65 R8.1 | v103.15,28.35 106.1,25.4 107.72,25.4 108.33,24.79 U4.1
N$17  (via drill 0.55)
  Top 0.254: v93.09,31.7 93.09,31.19 v94.41,29.87
  Bottom 0.254: v93.09,31.7 89.13,35.66 89.13,41.05 89.43,41.35 90.35,41.35 92.18,43.18 92.18,43.79 R9.1 | v94.41,29.87 96.14,29.87 107.72,18.29 109.14,18.29 109.65,18.8 109.65,19.91 U4.15
N$18
  Bottom 0.254: R18.1 94.82,36.17 96.44,36.17 103.96,28.65 103.96,28.14 105.69,26.42 109.04,26.42 109.55,25.91 109.55,24.79 U4.2
N$19
  Bottom 0.254: U4.3 110.87,26.21 109.14,27.94 109.14,28.04 109.35,28.25 109.35,29.36 109.14,29.57 109.14,30.07 99.29,39.93 98.68,39.93 R19.1
N$20
  Bottom 0.254: R20.1 98.68,43.79 98.68,42.98 111.28,30.38 111.48,30.38 112.09,29.77 112.09,29.57 111.89,29.36 111.89,28.25 112.09,28.04 112.09,27.94 111.99,27.84 111.99,25.91 112.19,25.7 112.19,24.79 U4.4
N$21
  Top 0.254: D11.2 83.03,70.71 83.03,71.83 87.1,75.89 87.4,75.89 D12.4
N$22
  Bottom 0.508: 136.73,9.2 137.9,10.36 137.9,13.72 138.1,13.92 R14.2 | 136.73,9.2 136.47,8.94 135.97,8.94 C23.P$1 135.66,8.94 135.56,9.04 133.33,9.04 128.85,13.51 128.85,15.14 U3.4 | R13.1 138.1,19 138.1,17.48 140.23,15.34 140.23,8.64 139.12,7.52 137.8,7.52 136.98,8.33 136.98,8.94 136.73,9.2
N$23  (via drill 0.55)
  Top 0.254: v93.6,40.23 93.5,40.34 93.5,41.66 D7.4 | v95.43,43.28 95.94,43.28 96.44,43.79 96.44,44.81 96.55,44.91 D1.2
  Bottom 0.254: v93.6,40.23 93.6,41.45 v95.43,43.28
N$24  (via drill 0.55)
  Top 0.254: v93.9,34.85 93.5,34.44 93.5,33.33 D8.4 | v96.14,35.05 96.55,35.46 96.55,36.47 D7.2
  Bottom 0.254: v93.9,34.85 95.94,34.85 v96.14,35.05
N$25
  Bottom 0.254: U4.5 113.41,26.01 113.31,26.11 113.31,26.72 113.82,27.23 116.36,27.23 117.27,28.14 117.27,32.51 102.13,47.65 98.68,47.65 R21.1
N$26  (via drill 0.55)
  Top 0.254: v92.28,37.59 92.28,27.03 92.89,26.42 v114.12,26.42
  Bottom 0.254: v92.28,37.59 92.28,39.93 R22.1 | v114.12,26.42 114.63,25.91 114.63,24.79 U4.6
N$28
  Top 0.254: D12.2 90.65,70.71 90.65,71.83 94.72,75.89 95.02,75.89 D13.4
N$29
  Top 0.254: D14.2 105.89,70.71 105.89,71.83 109.96,75.89 110.26,75.89 D15.4
N$30
  Top 0.254: D15.2 113.51,70.71 113.51,71.83 117.58,75.89 117.88,75.89 D16.4
N$31
  Top 0.254: D17.2 128.75,70.71 128.75,71.83 132.82,75.89 133.12,75.89 D18.4
N$32
  Top 0.254: D18.2 136.37,70.71 136.37,71.83 140.44,75.89 140.74,75.89 D19.4
N$33
  Top 0.254: D16.2 121.13,70.71 121.13,71.83 125.2,75.89 125.5,75.89 D17.4
NEUTRAL_LED  (via drill 0.55)
  Top 0.508: v122.15,60.66 112.39,60.66 110.67,58.93 D9.A | v195.5,43.59 195.5,42.27 197.54,40.23 197.94,40.23 199.06,39.12 199.57,39.12 J1.7
  Bottom 0.508: v122.15,60.66 173.76,60.66 189.41,45.01 193.78,45.01 195.2,43.59 v195.5,43.59
PIN_A
  Bottom 0.254: R9.2 90.45,43.89 90.45,44.7 91.97,46.23 93.19,46.23 95.43,48.46 95.43,48.67 96.14,49.38 103.56,49.38 104.98,50.8 111.38,50.8 112.09,50.09 112.09,49.99 112.9,49.17 113.11,49.17 U$3.7
PIN_B
  Bottom 0.254: R8.2 90.45,47.65 90.45,48.46 93.19,51.21 113.31,51.21 115.34,49.17 115.65,49.17 U$3.6
PIN_C
  Bottom 0.254: R18.2 92.89,36.17 92.89,34.75 95.94,31.7 98.68,31.7 107.31,23.06 112.29,23.06 112.8,23.57 112.8,25.91 112.39,26.31 112.39,27.64 113.11,28.35 113.11,28.75 U$3.4
PIN_D
  Bottom 0.254: R19.2 96.75,39.93 96.75,39.22 105.59,30.38 106.2,30.38 107.72,28.85 108.03,28.85 U$3.2
PIN_E
  Bottom 0.254: R20.2 96.75,43.79 96.75,42.37 95.43,41.05 95.43,38.71 105.28,28.85 105.49,28.85 U$3.1
PIN_F
  Bottom 0.254: R21.2 96.75,47.65 96.75,48.46 97.26,48.97 103.45,48.97 104.88,47.55 106.3,47.55 107.82,49.07 108.03,49.07 U$3.9
PIN_G  (via drill 0.55)
  Top 0.254: v102.44,46.23 105.28,49.07 105.49,49.07 U$3.10
  Bottom 0.254: v102.44,46.23 96.85,46.23 95.43,44.81 95.43,44.7 93.19,42.47 92.07,42.47 90.45,40.84 90.45,40.03 R22.2
SCL  (via drill 0.55)
  Top 0.254: v71.65,25.4 83.24,13.82 140.74,13.82 v141.15,13.41 | v153.85,19.51 v152.43,18.09
  Bottom 0.254: v71.65,25.4 71.35,25.4 70.84,25.91 70.84,28.45 70.43,28.85 69.42,28.85 69.01,28.45 69.01,27.23 U1.P$26 | v141.15,13.41 141.15,13.72 145.52,18.09 v152.43,18.09 | v153.85,19.51 154.66,19.51 157.2,22.05 157.2,23.57 U2.P$26
SDA  (via drill 0.55)
  Top 0.254: v73.18,24.99 83.95,14.22 160.35,14.22 v160.76,13.82
  Bottom 0.254: U1.P$27 70.23,25.7 71.35,24.59 72.77,24.59 v73.18,24.99 | v160.76,13.82 160.86,13.92 160.86,20.62 158.52,22.96 158.52,23.57 U2.P$27
VDD12V_DASH  (via drill 0.55)
  Top 0.508: v131.5,16.97 148.06,16.97 172.24,41.15 183.41,41.15 186.77,44.5 195.71,44.5 196.32,45.11 197.23,45.11 199.16,47.04 199.57,47.04 J1.2
  Bottom 0.508: R15.2 86.89,62.28 86.89,61.27 87.3,60.86 101.42,60.86 102.74,62.18 103.56,62.18 103.66,62.28 R17.2 103.76,62.59 103.76,63.4 104.27,63.91 106.7,63.91 108.13,62.48 R16.2 120.62,62.28 120.62,52.43 120.83,52.22 120.83,22.15 122.96,20.02 122.96,19.1 122.71,18.85 | 122.71,18.85 123.27,18.29 123.27,15.65 123.77,15.14 126.42,15.14 128.45,17.17 130.78,17.17 131.24,16.71 | 122.71,18.85 122.55,19 121.94,19 C22.P$1 | 131.24,16.71 131.39,16.56 131.39,15.24 U3.2 | v131.5,16.97 131.24,16.71
VDD_3V3  (via drill 0.55)
  Top 0.508: v31.01,23.88 31.01,20.52 27.56,17.07 26.75,17.07 U$1.SPLIT | v211.46,26.01 214.71,22.76 U$2.3.3V | v122.15,51.82 v119.91,51.82
  Bottom 0.508: v31.01,23.88 49.61,42.47 62.1,42.47 R5.2 62.31,44.81 R4.2 62.41,45.01 62.41,45.92 62.81,46.33 86.59,46.33 92.07,51.82 v119.91,51.82 | v211.46,26.01 170.51,26.01 157.61,38.91 157.61,39.62 R7.2 157.71,39.93 157.71,42.77 R6.2 157.5,42.98 157.4,43.08 140.13,43.08 131.39,51.82 v122.15,51.82
VIN  (via drill 0.55)
  Top 0.508: 80.09,69.09 80.09,69.19 79.88,69.39 79.88,70.61 D11.1 | 80.09,69.09 80.09,68.28 C21.P$1 | 87.71,69.09 87.71,69.19 87.5,69.39 87.5,70.61 D12.1 87.3,70.31 86.49,70.31 85.27,69.09 82.22,69.09 82.02,69.29 80.8,69.29 80.59,69.09 80.09,69.09 | 87.71,69.09 87.71,68.28 C7.P$1 | 95.33,69.09 95.33,69.19 95.12,69.39 95.12,70.61 D13.1 94.92,70.31 94.11,70.31 92.89,69.09 89.84,69.09 89.64,69.29 88.42,69.29 88.21,69.09 87.71,69.09 | 95.33,69.09 95.33,68.28 C8.P$1 | 102.95,69.09 102.95,69.19 102.74,69.39 102.74,70.61 D14.1 102.54,70.31 101.73,70.31 100.51,69.09 98.78,69.09 | 102.95,69.09 102.95,68.28 C9.P$1 | 95.33,69.09 95.83,69.09 96.04,69.29 97.26,69.29 97.46,69.09 98.78,69.09 | 110.57,69.09 110.57,69.19 110.36,69.39 110.36,70.61 D15.1 110.16,70.31 109.35,70.31 108.13,69.09 105.08,69.09 104.88,69.29 103.66,69.29 103.45,69.09 102.95,69.09 | 110.57,69.09 110.57,68.28 C14.P$1 | 118.19,69.09 118.19,69.19 117.98,69.39 117.98,70.61 D16.1 117.78,70.31 116.97,70.31 115.75,69.09 112.7,69.09 112.5,69.29 111.28,69.29 111.07,69.09 110.57,69.09 | 118.19,69.09 118.19,68.28 C15.P$1 | C18.P$1 141.05,68.28 141.05,69.19 140.84,69.39 140.84,70.61 D19.1 140.64,70.31 138.3,70.31 137.08,69.09 134.65,69.09 134.44,69.29 134.14,69.29 133.93,69.09 133.43,69.09 | 125.81,69.09 125.81,69.19 125.6,69.39 125.6,70.61 D17.1 125.4,70.31 124.59,70.31 123.37,69.09 123.06,69.09 | 125.81,69.09 125.81,68.28 C16.P$1 | 133.43,69.09 133.43,69.19 133.22,69.39 133.22,70.61 D18.1 133.02,70.31 132.21,70.31 130.99,69.09 127.94,69.09 127.74,69.29 126.52,69.29 126.31,69.09 125.81,69.09
  Top 0.508: 133.43,69.09 133.43,68.28 C17.P$1 | 118.19,69.09 118.69,69.09 118.9,69.29 120.12,69.29 120.32,69.09 123.06,69.09 | 123.06,69.09 123.06,51.41 121.74,50.09 121.74,49.07 C1.P$1 121.74,48.87 121.74,48.26 122.45,47.55 123.47,47.55 124.69,46.33 124.69,45.11 D2.1 124.69,44.81 124.69,43.79 124.08,43.18 123.98,43.18 121.84,41.05 121.84,40.44 C5.P$1 121.74,40.23 121.74,39.62 122.45,38.91 123.47,38.91 124.69,37.69 124.69,36.47 D4.1 124.69,36.17 124.69,35.15 124.38,34.85 123.88,34.85 121.84,32.82 121.84,32.21 C4.P$1 121.74,32 121.74,31.39 122.45,30.68 123.47,30.68 124.69,29.46 124.69,28.25 D6.1 124.89,27.94 125.09,27.74 125.7,27.74 v125.91,27.53 | C19.P$1 98.68,48.77 98.58,48.87 98.17,48.87 | 98.17,48.87 97.97,48.87 94.41,45.31 | 94.41,45.31 93.7,45.31 93.4,45.01 D1.1 | 94.36,36.93 94.21,36.78 93.7,36.78 93.5,36.58 D7.1 | 94.36,36.93 96.6,39.17 | 96.6,39.17 97.87,40.44 99.49,40.44 C2.P$1 | C3.P$1 98.68,32 98.58,32.11 97.97,32.11 97,31.14 | 96.6,30.73 94.41,28.55 93.7,28.55 93.4,28.25 D8.1 | 96.6,30.73 97,31.14 | v97.26,30.89 97,31.14 | 94.36,36.93 95.22,36.07 95.22,32.11 96.6,30.73 | 96.6,39.17 95.22,40.54 95.22,42.16 94.51,42.88 94.51,43.69 94.61,43.79 94.61,45.01 94.51,45.11 94.41,45.31 | 98.78,69.09 98.78,49.99 98.17,49.38 98.17,48.87
  Bottom 0.508: C23.P$2 138.51,8.94 139.01,8.94 139.52,9.45 139.52,15.04 136.37,18.19 136.37,18.9 136.27,19 R13.2 136.27,19.3 136.27,21.13 135.97,21.44 135.97,22.66 L1.P$2 135.97,22.86 135.97,24.28 136.12,24.43 | 136.12,24.43 141.25,29.57 147.45,29.57 C6.P$1 147.65,29.46 148.16,29.46 148.77,28.85 148.77,28.65 149.38,28.04 156.59,28.04 159.84,24.79 159.74,24.69 159.74,23.88 U2.P$28 159.84,23.67 166.24,23.67 R24.2 166.45,23.67 166.45,24.59 166.95,25.09 171.93,25.09 172.19,24.84 | 172.19,24.84 172.03,24.69 172.03,23.77 171.93,23.67 R23.2 | 172.19,24.84 172.44,25.09 174.88,25.09 176.3,23.67 178.13,23.67 C12.P$1 178.33,23.67 178.74,23.67 179.25,24.18 179.25,24.28 180.06,25.09 217.45,25.09 219.79,22.76 U$2.VIN | J2.2 22.48,47.55 22.78,47.55 24.11,46.23 24.11,46.13 24.82,45.41 25.63,45.41 29.18,41.86 29.18,24.38 33.96,19.61 34.67,19.61 U$1.VDD 34.98,19.61 35.48,19.61 45.34,29.46 70.33,29.46 70.54,29.57 | 70.54,29.57 70.54,39.93 70.64,40.03 70.64,40.84 C10.P$1 | 71.3,28.8 71.45,28.65 71.45,27.23 U1.P$28 | 71.3,28.8 70.54,29.57 | U4.16 108.33,20.02 108.13,20.02 v97.26,30.89 97.05,30.79 73.28,30.79 71.3,28.8 | 136.12,24.43 133.02,27.53 v125.91,27.53
WARM_LED
  Bottom 0.508: D5.A 125.6,58.73 126.42,57.91 126.42,57.81 139.93,44.3 193.47,44.3 196.83,40.95 198.86,40.95 199.06,41.15 200.89,41.15 201.8,40.23 202.01,40.23 203.12,39.12 203.63,39.12 J1.6

## Text on the board
tPlace: Lehigh FSAE LR21_DASH REV - 1 | *Made In Mohler By Pixies* | RPM | ACCEL | NEUTRAL | WARM | WLED | DAQ / PWR | DAQ / STAT | ALED | DAQ / LOG | SHIFT / NO / WORK | TOGGLE UP | TOGGLE DOWN | TOGGLE UP | TOGGLE DOWN | GEAR POSITION